# Altium PCB Mainboard.PcbDoc
Units mil, origin at the board's own origin, x right, y up, seen from the top; angles counter-clockwise.
Board outline 3816.81 x 2675.98 mil, 2 copper layers (Top Layer, Bottom Layer); 40 components, 44 nets, 262 pads, 14 vias.
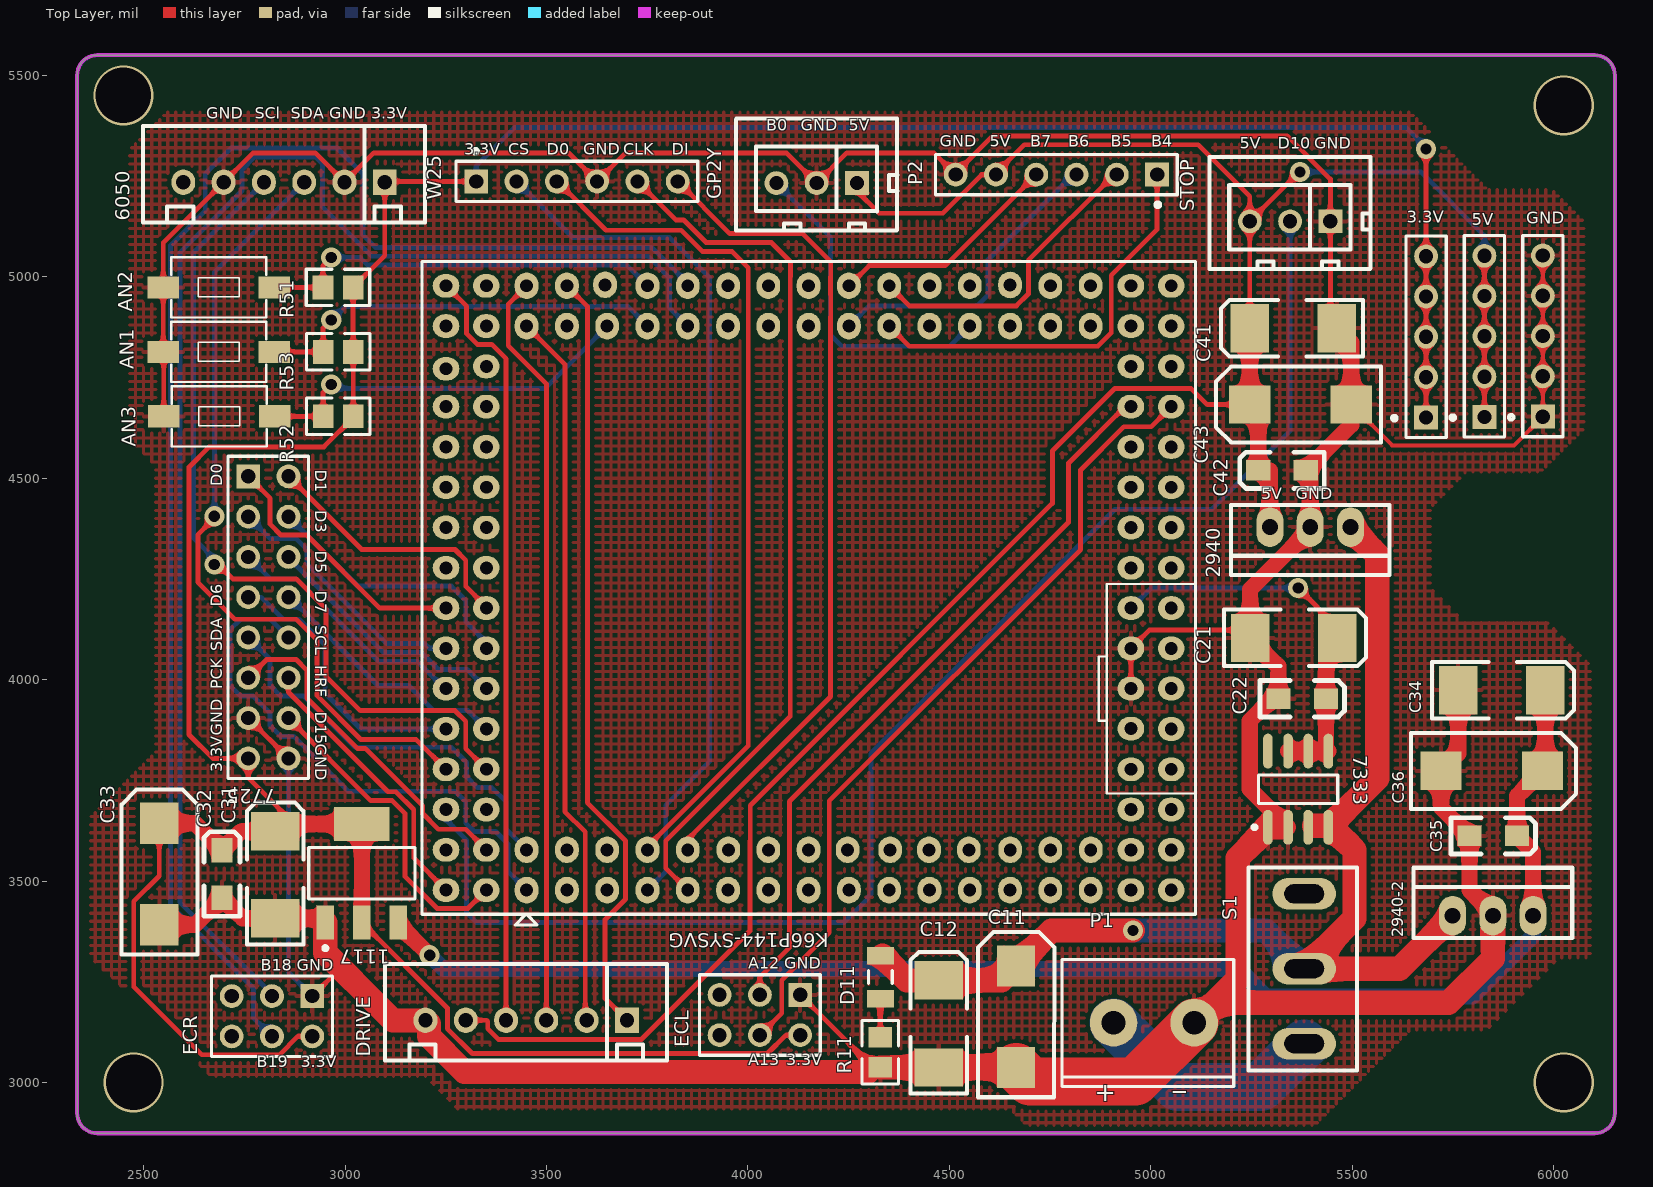
[diagram p0: Top Layer view]
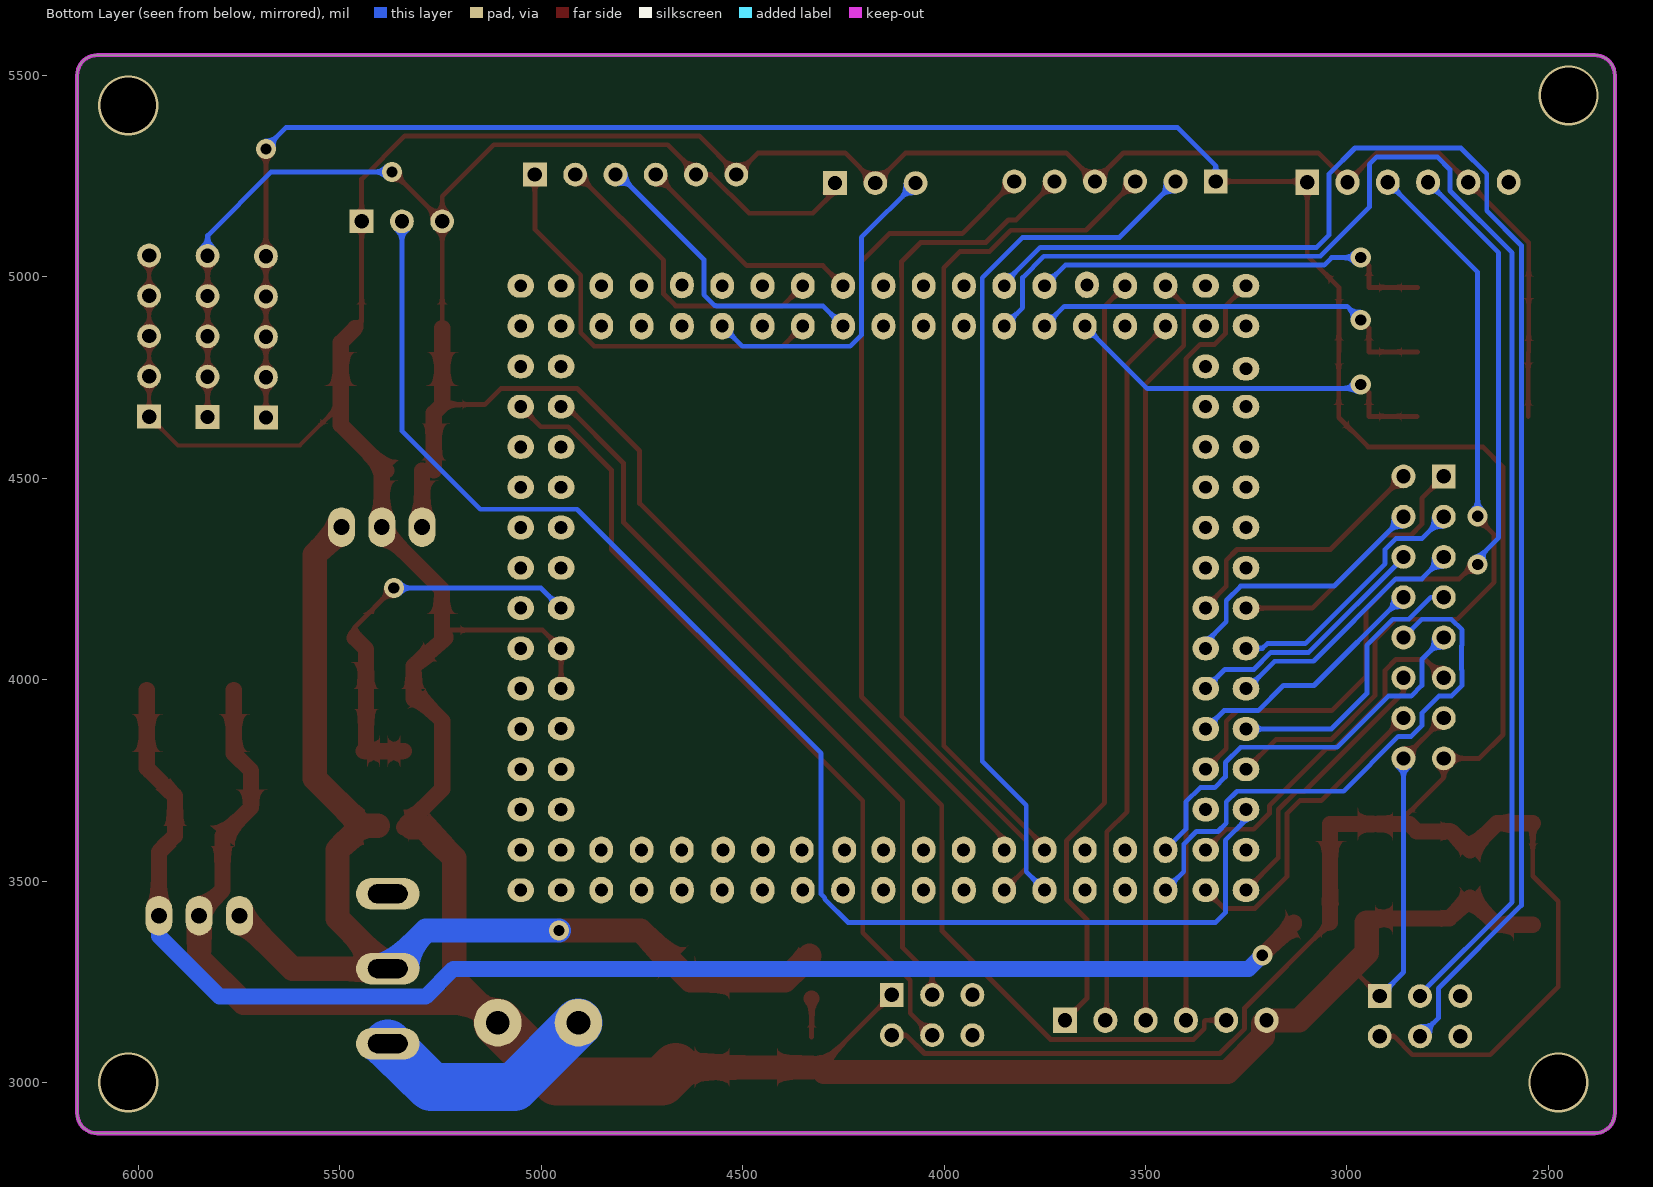
[diagram p1: Bottom Layer view, seen from below]
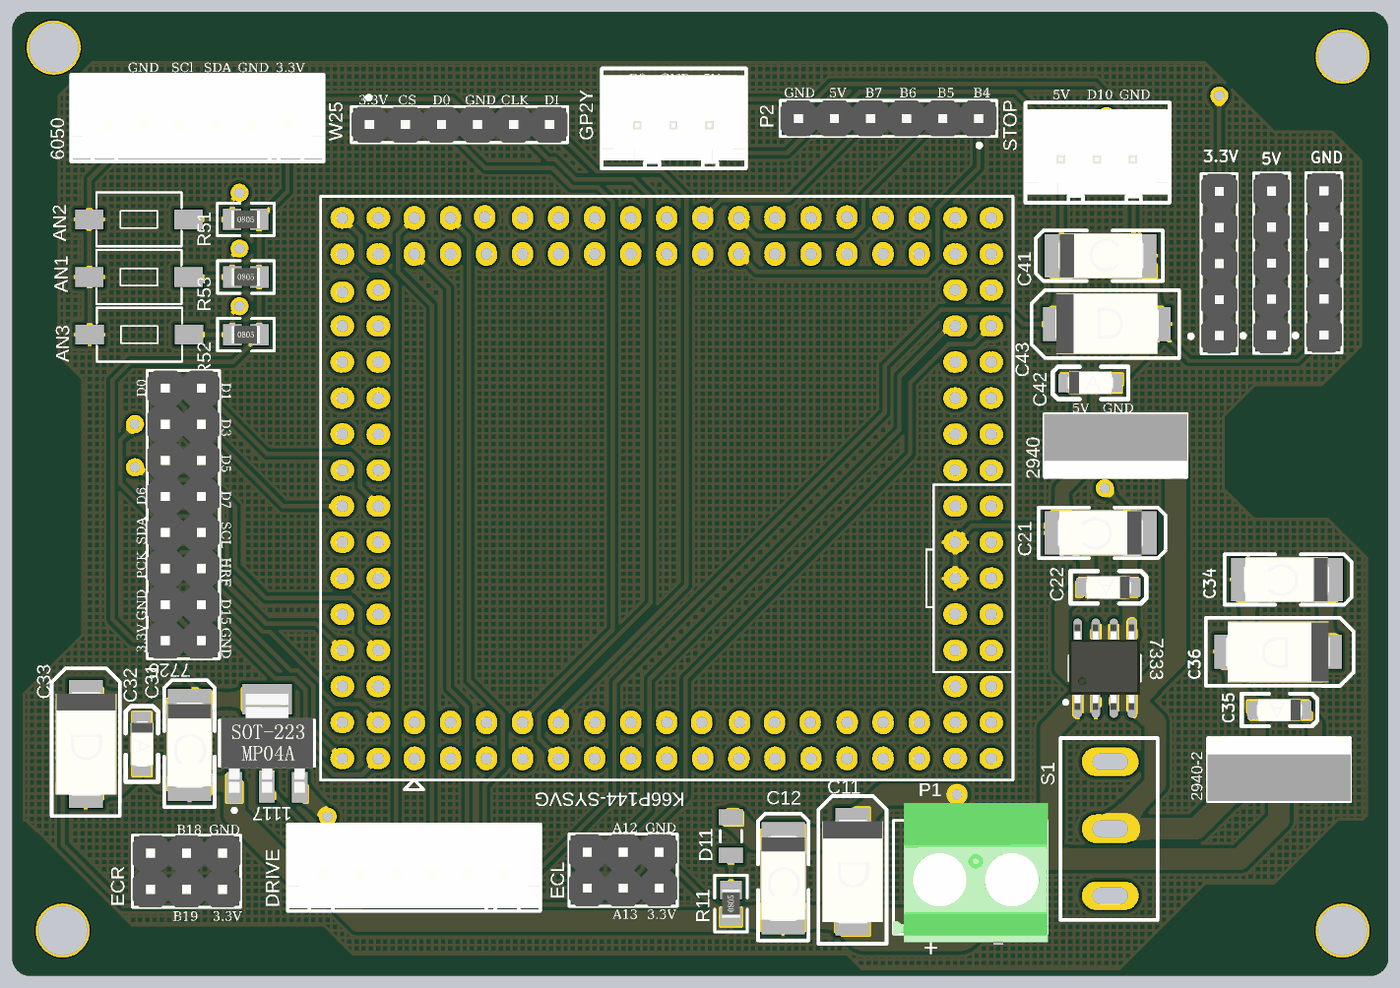
[diagram p2: 3D render of the assembled board from above, using the file's embedded part models]

## Layer stack, top to bottom
Top Solder: solder mask 0.4, Solder Resist, Dk 3.5
Top Layer: signal copper 1.4
Dielectric 1: dielectric 12.6, FR-4, Dk 4.8
Bottom Layer: signal copper 1.4
Bottom Solder: solder mask 0.4, Solder Resist, Dk 3.5

## Board outline
2385,2874.02 cw(c2385,2924.02) 2335,2924.02 2335,5500 cw(c2385,5500) 2385,5550 6101.81,5550 cw(c6101.81,5500) 6151.81,5500 6151.81,2924.02 cw(c6101.81,2924.02) 6101.81,2874.02

## Design rules (kind name [scope] priority, off if disabled: settings)
Clearance [All] p1: gap=10 ignorepadtopadclearanceinfootprint=FALSE except(0: Arc-Hole Track-Hole SMDPad-Hole THPad-Hole Via-Hole Fill-Hole Poly-Hole Region-Hole Text-Hole)
Height [All] p1: minheight=0 maxheight=2000 prefheight=500
HoleSize [All] p1: absolutevalues=TRUE maxlimit=157.48 minlimit=1 maxpercent=80.000 minpercent=20.000
PolygonConnect [All] p1: connectstyle=Relief reliefconductorwidth=10 reliefentries=4 polygonreliefangle="90 Angle" airgapwidth=10
RoutingVias [All] p1: holewidth=28 width=50 viastyle="Through Hole" minholewidth=28 minwidth=50 maxholewidth=28 maxwidth=50
SilkToSilkClearance [All] p1: silktosilkclearance=0
SilkToSolderMaskClearance [IsPad] p1: minsilkscreentomaskgap=0 clearancetoexposedcopper=TRUE
SolderMaskExpansion [All] p1: expansion=4
Width [All] p1: maxlimit=150 minlimit=10 preferedwidth=12 minimp=50.000000 maximp=50.000000 favimp=50.000000
26 further rules are at their usual default settings.

## Components (designator, comment, footprint, x,y, rotation, side; value= is the part's Value field where it differs from the comment)
3.3V "Header 5" HDR1X5 5683.14,4650.68 r90 top
5V "Header 5" HDR1X5 5828,4652 r90 top
1117 "17" SOT-223 3041.63,3519.44 r0 top
2940 "40-1" TO-220B 5395.63,4378.44 r180 top
2940-2 "LM2940" TO-220B 5849,3414 r0 top
6050 "Header 6" HX2.54-6 3098.63,5234.44 r180 top
7333 "7333" SO8_N 5365.63,3727.95 r90 top
7725 "Header 8X2" HDR2X8 2759.63,4504.44 r270 top
AN1 "Button" SMT4*6*2.5 2686.63,4813.44 r0 top
AN2 "Button" SMT4*6*2.5 2686.63,4973.44 r0 top
AN3 "Button" SMT4*6*2.5 2687.83,4653.44 r0 top
C11 "Cap Pol3" C7343 4665.35,3163.35 r270 top value=100uF
C12 "Cap Pol3" C6032 4472.63,3141.44 r270 top value=10uF
C21 "Cap Pol3" C6032 5350.63,4104.44 r180 top value=10uF
C22 "Cap Pol3" C3216 5375.63,3952.44 r180 top value=0.1uF
C31 "Cap Pol3" C6032 2825.63,3511.44 r270 top value=10uF
C32 "Cap Pol3" C3216 2694.63,3517.44 r270 top value=0.1uF104
C33 "Cap Pol3" C7343 2538.63,3517.44 r270 top value=100uF
C34 "Cap Pol3" C6032 5867,3975 r180 top value=10uF
C35 "Cap Pol3" C3216 5850,3612 r180 top value=0.1uF104
C36 "Cap Pol3" C7343 5846,3774 r180 top value=100uF
C41 "Cap Pol3" C6032 5357.63,4871.44 r0 top value=10uF
C42 "Cap Pol3" C3216 5325.63,4519.44 r0 top value=0.1uF104
C43 "Cap Pol3" C7343 5371.63,4682.44 r0 top value=100uF
D11 "LED1" C1206 4328.63,3261.44 r270 top
DRIVE "Header 6" HX2.54-6 3699.63,3154.44 r180 top
ECL "Header 3X2" HDR2X3 4129.63,3217.44 r180 top
ECR "Header 3X2" HDR2X3 2918.63,3214.44 r180 top
GND "Header 5" HDR1X5 5973.1,4652.68 r90 top
GP2Y "Header 3" HX2.54-3 4270.63,5232.44 r180 top
K66P144-SYSVG "LQ_KXXP144-SYSVG" LQ_KXXP144-SYSVG 3450.63,3477.44 r0 top
P1 "Header 2" 2PIN-5.08A 5107.63,3148.44 r180 top
P2 "Header 6" HDR1X6 5015.63,5253.44 r180 top
R11 "Res3" R0805 4328.63,3074.84 r90 top
R51 "Res3" R0805 2982.63,4973.44 r0 top value=3.3K
R52 "Res3" R0805 2983.03,4653.44 r0 top value=3.3K
R53 "Res3" R0805 2983.03,4813.44 r0 top value=3.3K
S1 "S2W" SW-TO3 5380.63,3282.44 r0 top
STOP "Header 3" HX2.54-3 5445.63,5137.44 r180 top
W25 "MHDR1X6" HDR1X6 3325.63,5236.44 r0 top

## Footprints (in the part's own frame and the unit in brackets; to place one, negate y for a bottom-side part, rotate by r counter-clockwise, add the part's x,y. Pads: shape width x height; smd on the part's side, far side on the other; paste and mask are expansions set on the pad)
2PIN-5.08A [mm]
  round 3 hole 1.5: 1(0,0) 2(5.08,0)
  silkscreen extent -2.49,-3.99 8.33,4.01, body extent -2.54,-5.2 8.36,4.6, height 14.2
C1206 [mm] "Chip Capacitor, Body 3.2x1.6mm, IPC High Density"
  rect 1.1x1.7 smd: 1(-1.35,0) 2(1.35,0)
  silkscreen extent -0.4,-0.75 0.4,0.75, body extent -1.7,-0.9 1.7,0.9, height 1.3
C3216 [mil] "A型/1206"
  rect 60x51.18 smd: 1(-59,0) 2(59,0)
  silkscreen extent -105,-45 105,45, body extent -63,-31 63,32, height 63
C6032 [mil] "C型"
  rect 95x120 smd: 1(-112,1) 2(104,1)
  silkscreen extent -183,-69 169,71, body extent -121,-62 115,64, height 102
C7343 [mm] "D型"
  rect 2.6x2.4 smd: 1(-3.202,0.007) 2(3.198,0.007)
  silkscreen extent -5.33,-2.39 5.08,2.41, body extent -3.65,-2.12 3.65,2.18, height 2.9
HDR1X5 [mm] "Connector; Header; 5 Position"
  rect 1.5x1.5 hole 0.9: 1(0,0)
  round 1.5 hole 0.9: 2(2.54,0) 3(5.08,0) 4(7.62,0) 5(10.16,0)
  silkscreen extent -1.27,-1.27 11.43,2.14, body extent -1.27,-1.27 11.43,1.27, height 8.54
HDR1X6 [mm] "Connector; Header; 6 Position"
  rect 1.5x1.5 hole 0.9: 1(0,0)
  round 1.5 hole 0.9: 2(2.54,0) 3(5.08,0) 4(7.62,0) 5(10.16,0) 6(12.7,0)
  silkscreen extent -1.27,-1.27 13.97,2.04, body extent -1.27,-1.27 13.97,1.27, height 8.54
HDR2X3 [mm] "Connector; Header; 3x2 Position"
  rect 1.5x1.5 hole 0.9: 1(0,0)
  round 1.5 hole 0.9: 2(0,2.54) 3(2.54,0) 4(2.54,2.54) 5(5.08,0) 6(5.08,2.54)
  silkscreen extent -1.27,-1.27 6.35,3.81, body extent -1.27,-1.27 6.35,3.81, height 8.54
HDR2X8 [mm] "Connector; Header; 8x2 Position"
  rect 1.5x1.5 hole 0.9: 1(0,0)
  round 1.5 hole 0.9: 2(0,2.54) 3(2.54,0) 4(2.54,2.54) 5(5.08,0) 6(5.08,2.54) 7(7.62,0) 8(7.62,2.54) 9(10.16,0) 10(10.16,2.54) 11(12.7,0) 12(12.7,2.54) 13(15.24,0) 14(15.24,2.54) 15(17.78,0) 16(17.78,2.54)
  silkscreen extent -1.27,-1.27 19.05,3.81, body extent -1.27,-1.27 19.05,3.81, height 8.54
HX2.54-3 [mm]
  rect 1.5x1.5 hole 0.9: 1(0,0)
  round 1.5 hole 0.9: 2(2.54,0) 3(5.08,0)
  silkscreen extent -2.54,-4.06 7.63,3, body extent -2.41,-3.58 7.59,2.42, height 7
HX2.54-6 [mm]
  rect 1.5x1.6 hole 0.9: 1(0,0)
  oval 1.5x1.6 hole 0.9: 2(2.54,0) 3(5.08,0) 4(7.62,0) 5(10.16,0) 6(12.7,0)
  silkscreen extent -2.54,-3.56 15.24,2.54, body extent -2.54,-3.63 15.24,2.36, height 6.1
LQ_KXXP144-SYSVG [mil]
  oval 59x66 hole 32: 1(0,0) 2(0,100) 3(100,0) 4(100,100) 5(200,0) 6(200,100) 7(300,0) 8(300,100) 9(400,0) 10(400,100) 11(500,0) 12(500.79,100) 13(600,0) 14(600,100) 15(700,0) 16(700,100) 17(800,0) 18(796.85,100) 19(900,0) 20(902.36,100) 21(1000,0) 22(998.82,100) 23(1100,0) 24(1097.64,100) 25(1200,0) 26(1200.39,100) 27(1300,0) 28(1300,100) 29(1400,0) 30(1400.39,100) 63(1400,1500) 64(1400,1400) 65(1300,1500) 66(1300,1400) 67(1200,1501.97) 68(1200,1400) 69(1100,1500) 70(1100,1400) 71(1000,1500) 72(1000,1400) 73(900,1500) 74(900,1400) 75(800,1500) 76(800,1400) 77(700,1500) 78(700,1400) 79(600,1500) 80(600,1400) 81(500,1500) 82(500,1400) 83(400,1500) 84(400,1400) 85(300,1500) 86(300,1400) 87(194.88,1502.36) 88(200,1400) 89(100,1500) 90(100,1400) 91(0,1500) 92(0,1400)
  oval 66x59 hole 32: 31(1500,0) 32(1600,0) 33(1500,100) 34(1600,100) 35(1500,200) 36(1600,200) 37(1500,300) 38(1600,300) 39(1500,400.79) 40(1600,400) 41(1500,500) 42(1600,500.39) 43(1500,600) 44(1600,600) 45(1500,700) 46(1600,700) 47(1500,800) 48(1600,800) 49(1500,900) 50(1600,900) 51(1500,1000) 52(1600,1000) 53(1500,1100) 54(1600,1100) 55(1500,1200) 56(1600,1200) 57(1500,1300) 58(1600,1300) 59(1500,1400) 60(1600,1400) 61(1500,1500) 62(1600,1500) 93(-100,1500) 94(-200,1500) 95(-100,1400) 96(-200,1400) 97(-100,1300) 98(-200,1294.09) 99(-100,1200) 100(-200,1200) 101(-100,1100) 102(-200,1100) 103(-100,1000) 104(-200,1000) 105(-100,899.61) 106(-200,900.39) 107(-100,800) 108(-200,800) 109(-100,700) 110(-200,700) 111(-100,600) 112(-200,600) 113(-100,500) 114(-200,500) 115(-100,400) 116(-200,400) 117(-100,300) 118(-200,300) 119(-100,200) 120(-200,200) 121(-100,100) 122(-200,100) 123(-100,0) 124(-200,0)
  silkscreen extent -260,-87 1660,1560
R0805 [mm]
  rect 1.3x1.5 smd: 1(-0.95,0) 2(0.95,0)
  silkscreen extent -2,-1.15 2,1.15, body extent -1,-0.63 1,0.63, height 0.55
SMT4*6*2.5 [mm]
  rect 2x1.4 smd: 1(-3.5,0) 2(3.5,0)
  silkscreen extent -3,-1.9 3,1.9, body extent -2.85,-1.75 3.25,1.95, height 2.5
SO8_N [mm] "SOIC, 8-Leads, Body 4.9x3.9mm, Pitch 1.27mm, IPC Medium Density"
  oval 2.2x0.6 smd: 1(-2.4,1.905) 2(-2.4,0.635) 3(-2.4,-0.635) 4(-2.4,-1.905) 5(2.4,-1.905) 6(2.4,-0.635) 7(2.4,0.635) 8(2.4,1.905)
  silkscreen extent -2.52,-2.5 0.9,2.88, body extent -2.94,-2.48 3.1,2.54, height 1.6
SOT-223 [mm]
  rect 1.1x2.15 smd: 1(-2.3,-3.1) 2(0,-3.1) 3(2.3,-3.1)
  rect 3.5x2.15 smd: 2(0,3.1)
  silkscreen extent -3.35,-4.85 3.35,1.63, body extent -3.25,-3.48 3.25,3.48, height 1.7
SW-TO3 [mm]
  oval 4x2 hole 1.2 slot 2.5 at 0 deg: 1(0,-4.724) 2(0,0) 3(0,4.724)
  silkscreen extent -3.5,-6.43 3.33,6.39, body extent -3.43,-6.36 3.43,6.35, height 28.55
TO-220B [mm]
  oval 1.7x2.5 hole 1: 1(-2.54,0) 2(0,0) 3(2.54,0)
  silkscreen extent -5,-1.4 5,3.02, body extent -5.08,-1.4 5.08,3.18, height 18.54

## Part data
3.3V 5V GND: "Header, 5-Pin", LatestRevisionDate=17-Jul-2002, LatestRevisionNote="Re-released for DXP Platform.", Publisher="Altium Limited"
1117: library part AMS1117, "SOT-223"
2940: library part LM2940, "SOT-223"
2940-2: "SOT-223"
6050 DRIVE P2 W25: "Header, 6-Pin", Publisher="Altium Limited"
  6050 DRIVE P2: LatestRevisionDate=17-Jul-2002, LatestRevisionNote="Re-released for DXP Platform."
  W25: Revision="17-Jul-2002: Re-released for DXP Platform."
7725: "Header, 8-Pin, Dual row", LatestRevisionDate=17-Jul-2002, LatestRevisionNote="Re-released for DXP Platform.", Publisher="Altium Limited"
C11 C12 C21 C22 C31 C32 C33 C34 C35 C36 C41 C42 C43: "Polarized Capacitor (Surface Mount)", LatestRevisionDate=29-May-2009, LatestRevisionNote="IPC-7351 Footprint Added.", PackageDescription="Chip Capacitor", PackageReference=C0805, Published=8-Jun-2000, Publisher="Altium Limited"
D11: library part LED3, "Typical BLUE SiC LED", DatasheetVersion=16-Apr-2002, LatestRevisionDate=17-Dec-2003, LatestRevisionNote="PCB Footprint replaced.", PackageDescription="SM LED; 2 C-Bend Leads; Body 3.5 x 2.8 x 1.9 mm, inc leads (LxWxH typ)", PackageReference=3.5X2.8X1.9, PackageVersion=16-Apr-2002, Published=8-Jun-2000, Publisher="Altium Limited"
ECL ECR: "Header, 3-Pin, Dual row", LatestRevisionDate=17-Jul-2002, LatestRevisionNote="Re-released for DXP Platform.", Publisher="Altium Limited"
GP2Y STOP: "Header, 3-Pin", LatestRevisionDate=17-Jul-2002, LatestRevisionNote="Re-released for DXP Platform.", Publisher="Altium Limited"
P1: "Header, 2-Pin", LatestRevisionDate=17-Jul-2002, LatestRevisionNote="Re-released for DXP Platform.", Publisher="Altium Limited"
R11 R51 R52 R53: "Resistor", LatestRevisionDate=29-May-2009, LatestRevisionNote="IPC-7351 Footprint Added.", PackageDescription="Chip Resistor", PackageReference=J1-0603, Published=8-Jun-2000, Publisher="Altium Limited"
S1: library part SW-SPST, "Single-Pole, Single-Throw Switch", LatestRevisionDate=17-Jul-2002, LatestRevisionNote="Re-released for DXP Platform.", PackageDescription="Switch; 2 Leads", PackageReference=SPST-2, Published=24-Mar-1999, Publisher="Altium Limited"
AN1 AN2 AN3: LatestRevisionDate=17-Jul-2002, LatestRevisionNote="Re-released for DXP Platform.", PackageReference=SPST-2, Published=24-Mar-1999, Publisher="Altium Limited"

## Via types
v1: diameter 50, hole 28, Top Layer to Bottom Layer, 10 vias
v2: diameter 149.61, hole 137.8, Top Layer to Bottom Layer, 4 vias

## Nets (pads, with @x,y where several pads share a name; then routed paths per layer and width w, separated by ;. In a path a pad name is that pad's centre, name@x,y a point inside that pad or via, vN(x,y) a via of type N, cw(c..) or ccw(c..) an arc to the next point about the centre after c; other vN are vias at no path point)
3.3V: 3.3V.1 3.3V.2 3.3V.3 3.3V.4 3.3V.5 1117.2 6050.1 7725.15 C31.1 C32.1 C33.1 ECL.2 ECR.2 R51.2 R52.2 R53.2 W25.1 | length 8501.5
  Top Layer w12: C33.1 2538.91,3512.59 2475.66,3449.34 2475.66,3237.41 2644.16,3068.91 2837.49,3068.91 2883.02,3114.44 ECR.2 ; C31.1@2866.63,3649.49 2759.63,3756.49 7725.15 2671.63,3804.44 2612.63,3863.44 2612.63,4527.44 2662.63,4577.44 2947.38,4577.44 3020.43,4650.5 R52.2 R53.2 3020.03,4813.84 R51.2 3098.63,5052.04 6050.1 3100.63,5236.44 W25.1 ; 1117.2@3041.63,3397.39 3254.1,3184.92 3254.1,3133.61 3315.8,3071.91 4048.49,3071.91 4094.02,3117.44 ECL.2 ; v1(5683,5317) 5683,5106.82 5683.14,5106.68 3.3V.5 3.3V.4 3.3V.3 3.3V.2 3.3V.1
  Top Layer w40: C33.1 2627.57,3643.5 C32.1 2741.63,3623.44 C31.1 2844.68,3641.49 3041.63,3641.49 1117.2@3041.63,3397.39
  Bottom Layer w12: W25.1 3325.63,5275.63 3420,5370 5634,5370 5683,5321 v1(5683,5317)
5V: 5V.1 5V.2 5V.3 5V.4 5V.5 2940.3 C41.1 C42.1 C43.1 DRIVE.5 GP2Y.1 P2.5 STOP.3 | length 6078.9
  Top Layer w12: DRIVE.5 3351.84,3154.44 3354.1,3152.18 3354.1,3133.61 3380.77,3106.94 3735.78,3106.94 4005.13,3376.29 4005.13,3599.79 4005.63,3600.29 4005.63,3687.44 4755.63,4437.44 4755.63,4567.44 4911.13,4722.94 5099.63,4722.94 5139.85,4682.72 C43.1 ; GP2Y.1@4295.63,5207.44 GP2Y.1 4270.63,5212.44 4325.63,5157.44 4484.02,5157.44 4580.02,5253.44 P2.5 4615.63,5257.44 4685.63,5327.44 5117.63,5327.44 5245.63,5199.44 STOP.3 ; C41.1 C41.1 STOP.3 ; v1(5370,5260) 5368.19,5260 STOP.3 ; 5V.1 5V.2 5V.3 5V.4 5V.5
  Top Layer w40: C41.1 C43.1 5266.63,4661.65 C42.1 ; 2940.3 C42.1@5295.63,4519.44
  Bottom Layer w12: v1(5370,5260) 5670,5260 ; 5671,5260 5670,5260 ; 5V.5 5828,5102 5670,5260
5V-2: 1117.3 2940-2.3 C34.1 C35.1 C36.1 | length 3613.3
  Top Layer w40: 1117.3 3132.18,3393.82 v1(3210,3316) ; 2940-2.3 5949,3572 C35.1 5909,3710.66 C36.1 5979,3780.66 C34.1
  Bottom Layer w40: v1(3210,3316) 3244,3282 5218,3282 5286.93,3213.07 5798.07,3213.07 5949,3364 2940-2.3
ADC1_SE8: GP2Y.3 K66P144-SYSVG.70 | length 810.7
  Bottom Layer w12: GP2Y.3 4205.13,5097.94 4205.13,4855.09 4232.78,4827.44 4500.63,4827.44 K66P144-SYSVG.70
ADC1_SE10: K66P144-SYSVG.74 P2.1 | length 1025.5
  Top Layer w12: K66P144-SYSVG.74 4400.63,4827.44 4868.48,4827.44 4901.63,4860.59 4901.63,5003.44 5015.63,5117.44 P2.1
ADC1_SE11: K66P144-SYSVG.73 P2.2 | length 769.8
  Top Layer w12: K66P144-SYSVG.73 4400.63,4927.44 4666.51,4927.44 4696.13,4957.06 4696.13,5040.79 4908.78,5253.44 P2.2
ADC1_SE12: K66P144-SYSVG.76 P2.3 | length 772.1
  Bottom Layer w12: K66P144-SYSVG.76 4300.63,4927.44 4565.63,4927.44 4566.63,4928.44 4569.48,4928.44 4596.13,4955.09 4596.13,5042.76 4806.82,5253.44 P2.3
ADC1_SE13: K66P144-SYSVG.75 P2.4 | length 579.3
  Top Layer w12: K66P144-SYSVG.75 4300.63,5027.44 4489.63,5027.44 P2.4
CLK: K66P144-SYSVG.9 W25.5 | length 2173.2
  Top Layer w12: W25.5 3821.16,5140.91 3840.04,5140.91 3896.02,5084.94 4058.13,5084.94 4105.63,5037.44 4105.63,5000.29 4105.13,4999.79 4105.13,3908.79 3796.13,3599.79 3796.13,3531.94 K66P144-SYSVG.9
CS: K66P144-SYSVG.7 W25.2 | length 2162.5
  Bottom Layer w12: W25.2 3564.63,5097.44 3805.13,5097.44 3905.13,4997.44 3905.13,3796.94 3796.13,3687.94 3796.13,3522.94 K66P144-SYSVG.7
D0: 7725.1 K66P144-SYSVG.110 | length 667.2
  Top Layer w12: 7725.1 2814.1,4449.97 2814.1,4385.58 2840.77,4358.91 2905.16,4358.91 3086.63,4177.44 K66P144-SYSVG.110 K66P144-SYSVG.110@3250.63,4180.44
D1: 7725.2 K66P144-SYSVG.109 | length 666.2
  Top Layer w12: 7725.2 3041.13,4322.94 3272.98,4322.94 3299.63,4296.29 3299.63,4231.44 3350.63,4180.44 K66P144-SYSVG.109
D2: 7725.3 K66P144-SYSVG.112 | length 647.1
  Bottom Layer w12: 7725.3 2814.1,4349.97 2878.49,4349.97 2905.16,4323.3 2905.16,4288.07 3103.78,4089.44 3197.86,4089.44 3209.86,4077.44 K66P144-SYSVG.112
D3: 7725.4 K66P144-SYSVG.111 | length 666.2
  Bottom Layer w12: 7725.4 3032.13,4231.94 3263.98,4231.94 3299.63,4196.29 3299.63,4143.44 3350.63,4092.44 K66P144-SYSVG.111
D4: 7725.5 K66P144-SYSVG.114 | length 626.4
  Bottom Layer w12: 7725.5 2814.1,4249.97 2878.49,4249.97 3083.02,4045.44 3179.63,4045.44 3247.63,3977.44 K66P144-SYSVG.114
D5: 7725.6 K66P144-SYSVG.113 | length 627.6
  Bottom Layer w12: 7725.6 2859.63,4302.48 3094.67,4067.44 3188.74,4067.44 3230.76,4025.42 3302.65,4025.42 K66P144-SYSVG.113
D6: 7725.7 K66P144-SYSVG.116 | length 696.7
  Bottom Layer w12: 7725.7 2791.63,4204.44 2846.1,4149.97 2886.1,4149.97 2950.63,4085.44 2950.63,3965.44 3038.63,3877.44 K66P144-SYSVG.116
D7: 7725.8 K66P144-SYSVG.115 | length 626.4
  Bottom Layer w12: 7725.8 2862.74,4204.44 3081.74,3985.44 3157.63,3985.44 3220.13,3922.94 3305.13,3922.94 K66P144-SYSVG.115
DI: K66P144-SYSVG.10 W25.6 | length 2069.9
  Top Layer w12: W25.6 3955.13,5106.94 4136.13,5106.94 4205.63,5037.44 4205.63,5000.29 4205.13,4999.79 4205.13,4955.09 4205.63,4954.59 4205.63,4900.29 4205.13,4899.79 4205.13,3958.05 3850.63,3603.55 K66P144-SYSVG.10
DO: K66P144-SYSVG.8 W25.3 | length 2112.2
  Top Layer w12: W25.3 3526.63,5236.44 3647.63,5115.44 3834.4,5115.44 3886.9,5062.94 3960.13,5062.94 4000.63,5022.44 4000.63,3835.4 3750.63,3585.4 K66P144-SYSVG.8
"ECL A12": ECL.3 K66P144-SYSVG.55 | length 1850.3
  Top Layer w12: ECL.3 4029.63,3261.44 4102.78,3334.59 4102.78,3697.44 4795.63,4390.29 4795.63,4537.44 4935.63,4677.44 K66P144-SYSVG.55
"ECL A13": ECL.4 K66P144-SYSVG.56 | length 2022.7
  Top Layer w12: ECL.4 4084.1,3171.91 4084.1,3253.6 4201.98,3371.47 4201.98,3698.79 4825.63,4322.44 4825.63,4520.29 4932.78,4627.44 5000.63,4627.44 K66P144-SYSVG.56
"ECR B18": ECR.3 K66P144-SYSVG.84 | length 3609.8
  Bottom Layer w12: ECR.3 2818.63,3218.88 2590,3447.51 2590,5059.46 2744.16,5213.61 2744.16,5265.97 2775.63,5297.44 2925.63,5297.44 2944.16,5278.91 2944.16,5172.56 3065.91,5050.8 3752.27,5050.8 3805.13,4997.94 3805.13,4922.94 K66P144-SYSVG.84
"ECR B19": ECR.4 K66P144-SYSVG.83 | length 3738.9
  Bottom Layer w12: ECR.4 2773.1,3159.97 2773.1,3233.3 2567,3439.4 2567,5077.51 2653.1,5163.61 2653.1,5255.27 2717.28,5319.44 2979.98,5319.44 3044.16,5255.27 3044.16,5103.67 3075.03,5072.8 3761.38,5072.8 3850.63,4983.55 K66P144-SYSVG.83
GND: 1117.1 2940-2.2 2940.2 6050.2 6050.5 7333.1 7333.2 7725.13 7725.16 AN1.1 AN2.1 AN3.1 C11.2 C12.2 C21.2 C22.2 C31.2 C32.2 C33.2 C34.2 C35.2 C36.2 C41.2 C42.2 C43.2 DRIVE.6 ECL.1 ECR.1 GND.1 GND.2 GND.3 GND.4 GND.5 GP2Y.2 K66P144-SYSVG.41 K66P144-SYSVG.43 P1.1 P2.6 R11.1 STOP.1 W25.4 | length 13029.5
  Top Layer w10: C43.2 5599.25,4581 ; 5598.25,4581 5599.25,4581 ; 5900.43,4581 5599.25,4581 ; 5901.43,4581 GND.1 GND.2 GND.3 GND.4 GND.5
  Top Layer w12: AN3.1 2550.04,4812.24 AN1.1 AN2.1 2548.83,5084.65 6050.5 2771.63,5307.44 2925.63,5307.44 6050.2 3071.63,5307.44 3554.63,5307.44 W25.4 3696.63,5307.44 4095.63,5307.44 GP2Y.2 4245.63,5307.44 4461.63,5307.44 P2.6 4515.63,5257.44 4607.63,5349.44 5338.54,5349.44 5445.63,5242.35 STOP.1 5445.63,4888.44 C41.2 ; 7725.13 7725.16 ; ECR.1 2986.63,3282.44 2990.63,3282.44 ; 1117.1 1117.1@2951.08,3412.89 ; 3052.63,3214.44 3055.63,3217.44 ; ECL.1 4309.63,3037.44 R11.1 ; K66P144-SYSVG.41 K66P144-SYSVG.43 4996.13,4122.94 5227.13,4122.94 C21.2@5237.63,4103.44
  Top Layer w40: C33.2 2627.72,3391.54 C32.2 2745.63,3407.44 C31.2 2941.03,3407.44 1117.1 ; C21.2@5237.63,4103.44 5242.67,4098.97 5316.63,4033.44 C22.2 5300.63,3952.44 5245.63,3897.44 5245.63,3728.46 7333.2 ; C21.2 5246.63,4223.94 5395.63,4372.94 2940.2 C42.2@5395.63,4501.44 ; C42.2 5497.54,4632.35 C43.2 5497.54,4836.54 C41.2 ; C34.2 5763,3816.63 C36.2 5720.09,3682.91 C35.2 5791,3477.5 5849,3419.5 2940-2.2
  Top Layer w60: 1117.1 2951.08,3321.99 2990.63,3282.44 3055.63,3217.44 3118.93,3154.15 3199.63,3154.15 3208.1,3145.67 3208.1,3114.56 3296.75,3025.91 4298.1,3025.91 R11.1@4309.63,3037.44 ; R11.1 C12.2 C11.2 ; P1.1 5157.19,3198 ; 7333.1@5290.63,3632.44 5215.63,3557.44 5215.63,3256.44 5157.19,3198 ; 7333.1 5321.65,3633.46 5325.63,3637.44 ; 2940-2.2 5849,3308 5739,3198 5157.19,3198
  Top Layer w120: C11.2 4700.63,3002.44 4961.63,3002.44 P1.1
  Bottom Layer w12: 7725.16 2859.63,3273.44 ECR.1
HRF: 7725.12 K66P144-SYSVG.124 | length 700.5
  Top Layer w12: 7725.12 2859.63,3968.83 3106.65,3721.81 3126.27,3721.81 3170.53,3677.55 3170.53,3557.54 K66P144-SYSVG.124
IIC_SCL: 6050.4 K66P144-SYSVG.117 | length 2066.2
  Top Layer w12: v1(2675.63,4285.44) 2685.63,4285.44 2721.1,4249.97 2878.49,4249.97 2952.63,4175.83 2952.63,4008.44 3038.13,3922.94 3272.98,3922.94 3299.63,3896.29 3299.63,3828.44 K66P144-SYSVG.117
  Bottom Layer w12: v1(2675.63,4285.44) 2675.63,4300.44 2623.63,4352.44 2623.63,5059.44 6050.4
IIC_SDA: 6050.3 K66P144-SYSVG.118 | length 1991.3
  Top Layer w12: v1(2675.63,4405.44) 2675.63,4400.44 2634.63,4359.44 2634.63,4241.44 2726.1,4149.97 2878.49,4149.97 2930.63,4097.83 2930.63,3960.05 3039.53,3851.15 3176.92,3851.15 K66P144-SYSVG.118
  Bottom Layer w12: v1(2675.63,4405.44) 2675.63,5011.44 6050.3
KEY1: AN1.2 K66P144-SYSVG.86 R53.1 | length 1027.9
  Top Layer w12: AN1.2 R53.1 2945.63,4872.44 v1(2965.63,4892.44)
  Bottom Layer w12: v1(2965.63,4892.44) 2999.63,4926.44 3701.63,4926.44 K66P144-SYSVG.86
KEY2: AN2.2 K66P144-SYSVG.85 R51.1 | length 1017.2
  Top Layer w12: AN2.2 R51.1 2945.23,5027.04 v1(2965.63,5047.44)
  Bottom Layer w12: v1(2965.63,5047.44) 3038.16,5047.44 3056.8,5028.8 3699.27,5028.8 K66P144-SYSVG.85
KEY3: AN3.2 K66P144-SYSVG.88 R52.1 | length 963.4
  Top Layer w12: AN3.2 R52.1 2945.63,4712.44 v1(2965.63,4732.44)
  Bottom Layer w12: v1(2965.63,4732.44) 2965.63,4728.44 2971.13,4722.94 3272.98,4722.94 3273.48,4722.44 3327.78,4722.44 3328.28,4722.94 3372.98,4722.94 3373.48,4722.44 3495.63,4722.44 K66P144-SYSVG.88
NetD11_2: D11.2 R11.2 | length 96
  Top Layer w12: R11.2 D11.2
NetP1_2: P1.2 S1.1 | length 583.6
  Bottom Layer w120: P1.2 5067.13,2988.94 5273.13,2988.94 S1.1
PCK: 7725.11 K66P144-SYSVG.121 | length 857
  Top Layer w12: 7725.11 2805.16,4049.97 2878.49,4049.97 2905.16,4023.3 2905.16,3954.41 3030.42,3829.15 3050.04,3829.15 3192.53,3686.66 3192.53,3667.7 3231.78,3628.44 3299.63,3628.44 K66P144-SYSVG.121
PWM1: DRIVE.1 K66P144-SYSVG.89 | length 1926.6
  Top Layer w12: K66P144-SYSVG.89 3601.63,4926.44 3601.63,3694.29 3696.13,3599.79 3696.13,3455.09 3645.63,3404.59 3645.63,3208.44 DRIVE.1
PWM2: DRIVE.2 K66P144-SYSVG.92 | length 1784.7
  Top Layer w12: K66P144-SYSVG.92 3545.63,4782.44 3545.63,3672.4 3596.13,3621.9 3596.13,3157.94 DRIVE.2
PWM3: DRIVE.3 K66P144-SYSVG.91 | length 1881
  Top Layer w12: K66P144-SYSVG.91 3405.13,4931.94 3405.13,4828.44 3499.63,4733.94 DRIVE.3
PWM4: DRIVE.4 K66P144-SYSVG.94 | length 1905.6
  Top Layer w12: K66P144-SYSVG.94 3301.63,4926.44 3301.63,4858.59 3328.28,4831.94 3363.98,4831.94 3399.63,4796.29 DRIVE.4
SCCBSCL: 7725.10 K66P144-SYSVG.1 | length 1351.1
  Bottom Layer w12: 7725.10 2814.1,4149.97 2740.77,4149.97 2714.1,4123.3 2714.1,4085.58 2715.63,4084.06 2715.63,4024.83 2714.1,4023.3 2714.1,3985.58 2740.77,3958.91 2772.16,3958.91 2814.1,3916.97 2814.1,3885.58 2840.77,3858.91 2872.16,3858.91 3008.13,3722.94 3272.98,3722.94 3299.63,3696.29 3299.63,3643.44 3320.13,3622.94 3374.02,3622.94 3405.13,3591.83 3405.13,3522.94 K66P144-SYSVG.1
SCCBSDA: 7725.9 K66P144-SYSVG.2 | length 1007.7
  Bottom Layer w12: 7725.9 2814.1,4049.97 2814.1,3985.58 2840.77,3958.91 2897.16,3958.91 3024.13,3831.94 3263.98,3831.94 3301.63,3794.29 3301.63,3758.59 3328.28,3731.94 3363.98,3731.94 3399.63,3696.29 3399.63,3628.44 K66P144-SYSVG.2
STOP: K66P144-SYSVG.120 STOP.2 | length 3563.1
  Bottom Layer w12: K66P144-SYSVG.120 3250.63,3652.44 3301.63,3601.44 3301.63,3421.44 3325.63,3397.44 4238.48,3397.44 4296.13,3455.09 4296.13,3458.44 4305.13,3467.44 4305.13,3816.94 4911.13,4422.94 5151.13,4422.94 5345.63,4617.44 STOP.2
VB: 2940-2.1 2940.1 7333.3 7333.4 C11.1 C12.1 D11.1 S1.2 | length 2887.6
  Top Layer w40: D11.1 D11.1@4334.02,3314.59
  Top Layer w60: D11.1@4334.02,3314.59 4395.17,3253.44 C12.1 4629.66,3253.44 C11.1 4753.66,3377.44 v1(4955.63,3377.44) ; 5405.63,3637.44 7333.4@5444.61,3637.44 ; 2940.1 5495.63,4376.44 5562,4310.07 5562,3754.83 7333.4@5444.61,3637.44 ; 2940-2.1 5617.44,3282.44 S1.2 5505.63,3407.44 5505.63,3577.44 5449.61,3633.46 7333.4 7333.4@5444.61,3637.44
  Bottom Layer w60: v1(4955.63,3377.44) 5285.63,3377.44 S1.2
VCC: 7333.5 7333.6 7333.7 C21.1 C22.1 K66P144-SYSVG.45 | length 995
  Top Layer w12: v1(5365.63,4227.44) 5462.63,4130.44 C21.1
  Top Layer w40: 7333.7 7333.6 7333.5 5434.63,3828.44 C22.1 5434.63,4075.44 C21.1
  Bottom Layer w12: K66P144-SYSVG.45 5000.63,4227.44 v1(5365.63,4227.44)
VSY: 7725.14 K66P144-SYSVG.123 | length 797.4
  Top Layer w12: 7725.14 3064.26,3699.81 3117.16,3699.81 3148.53,3668.44 3148.53,3511.7 3228.28,3431.94 3305.13,3431.94 K66P144-SYSVG.123
pads on no net: 6050.6 7333.8 ECL.5 ECL.6 ECR.5 ECR.6 K66P144-SYSVG.3 K66P144-SYSVG.4 K66P144-SYSVG.5 K66P144-SYSVG.6 K66P144-SYSVG.11 K66P144-SYSVG.12 K66P144-SYSVG.13 K66P144-SYSVG.14 K66P144-SYSVG.15 K66P144-SYSVG.16 K66P144-SYSVG.17 K66P144-SYSVG.18 K66P144-SYSVG.19 K66P144-SYSVG.20 K66P144-SYSVG.21 K66P144-SYSVG.22 K66P144-SYSVG.23 K66P144-SYSVG.24 K66P144-SYSVG.25 K66P144-SYSVG.26 K66P144-SYSVG.27 K66P144-SYSVG.28 K66P144-SYSVG.29 K66P144-SYSVG.30 K66P144-SYSVG.31 K66P144-SYSVG.32 K66P144-SYSVG.33 K66P144-SYSVG.34 K66P144-SYSVG.35 K66P144-SYSVG.36 K66P144-SYSVG.37 K66P144-SYSVG.38 K66P144-SYSVG.39 K66P144-SYSVG.40 K66P144-SYSVG.42 K66P144-SYSVG.44 K66P144-SYSVG.46 K66P144-SYSVG.47 K66P144-SYSVG.48 K66P144-SYSVG.49 K66P144-SYSVG.50 K66P144-SYSVG.51 K66P144-SYSVG.52 K66P144-SYSVG.53 K66P144-SYSVG.54 K66P144-SYSVG.57 K66P144-SYSVG.58 K66P144-SYSVG.59 K66P144-SYSVG.60 K66P144-SYSVG.61 K66P144-SYSVG.62 K66P144-SYSVG.63 K66P144-SYSVG.64 K66P144-SYSVG.65 K66P144-SYSVG.66 K66P144-SYSVG.67 K66P144-SYSVG.68 K66P144-SYSVG.69 K66P144-SYSVG.71 K66P144-SYSVG.72 K66P144-SYSVG.77 K66P144-SYSVG.78 K66P144-SYSVG.79 K66P144-SYSVG.80 K66P144-SYSVG.81 K66P144-SYSVG.82 K66P144-SYSVG.87 K66P144-SYSVG.90 K66P144-SYSVG.93 K66P144-SYSVG.95 K66P144-SYSVG.96 K66P144-SYSVG.97 K66P144-SYSVG.98 K66P144-SYSVG.99 K66P144-SYSVG.100 K66P144-SYSVG.101 K66P144-SYSVG.102 K66P144-SYSVG.103 K66P144-SYSVG.104 K66P144-SYSVG.105 K66P144-SYSVG.106 K66P144-SYSVG.107 K66P144-SYSVG.108 K66P144-SYSVG.119 K66P144-SYSVG.122 S1.3
copper on no net:
  other v2: 2475,3000 6025,3000 6025,5425 2450,5450

## Polygon pours and split planes (outlines as drawn)
GND on Top Layer "Top Layer-No Net" (hatched 90Degree grid 20 track 8, pour order 4): 2400,3283 2668,3015 3200,3015 3281,2934 4652,2934 4692,2894 5407,2894 5644,3131 5834,3131 6012,3309 6081,3309 6091,3319 6091,4035 5984,4142 5779,4142 5694,4227 5694,4427 5782,4515 5967,4515 6075,4623 6075,5136 5995,5216 5836,5216 5643,5409 2559,5409 2465,5315 2465,4596 2530,4531 2530,3820 2368,3658 2368,3306 2373,3306 2402,3277

## Keep-outs
Keep-Out Layer:
  the board outline again, w10

## Silkscreen, mask and mechanical layers (free items; w line width, h text height)
Top Overlay:
  text "GND" at 2655.63,5382.44 h50
  text "SCl" at 2775.63,5382.44 h50
  text "SDA" at 2865.63,5382.44 h50
  text "GND" at 2960.63,5382.44 h50
  text "3.3V" at 3065.63,5382.44 h50
  text "B0" at 4045.63,5352.44 h50
  text "GND" at 4130.63,5352.44 h50
  text "5V" at 4250.63,5352.44 h50
  text "GND" at 4475.63,5312.44 h50
  text "5V" at 4600.63,5312.44 h50
  text "B7" at 4700.63,5312.44 h50
  text "B6" at 4795.63,5312.44 h50
  text "B5" at 4900.63,5312.44 h50
  text "B4" at 5000.63,5312.44 h50
  text "5V" at 5220.63,5307.44 h50
  text "D10" at 5315.63,5307.44 h50
  text "GND" at 5405.63,5307.44 h50
  text "3.3V" at 3295.63,5292.44 h50
  text "CS" at 3405.63,5292.44 h50
  text "D0" at 3500.63,5292.44 h50
  text "GND" at 3590.63,5292.44 h50
  text "CLK" at 3690.63,5292.44 h50
  text "DI" at 3810.63,5292.44 h50
  text "D1" at 2915.63,4520.44 h50 r270
  text "D0" at 2705.63,4480.44 h50 r90
  text "5V" at 5274.63,4437.44 h50
  text "GND" at 5359.63,4437.44 h50
  text "D3" at 2915.63,4420.44 h50 r270
  text "D5" at 2915.63,4320.44 h50 r270
  text "D7" at 2915.63,4220.44 h50 r270
  text "D6" at 2705.63,4180.44 h50 r90
  text "SCL" at 2915.63,4135.44 h50 r270
  text "SDA" at 2705.63,4070.44 h50 r90
  text "HRF" at 2915.63,4035.44 h50 r270
  text "PCK" at 2705.63,3975.44 h50 r90
  text "D15" at 2915.63,3920.44 h50 r270
  text "GND" at 2705.63,3860.44 h50 r90
  text "GND" at 2915.63,3840.44 h50 r270
  text "3.3V" at 2705.63,3770.44 h50 r90
  text "A12" at 4000.63,3272.44 h50
  text "GND" at 4090.63,3272.44 h50
  text "B18" at 2790.63,3267.44 h50
  text "GND" at 2880.63,3267.44 h50
  text "A13" at 4000.63,3032.44 h50
  text "3.3V" at 4095.63,3032.44 h50
  text "B19" at 2780.63,3027.44 h50
  text "3.3V" at 2890.63,3027.44 h50
  text "_" at 5056.26,2971.81 h78.74
  text "+" at 4861.26,2936.81 h78.74